# Altium PCB DE-020717.PcbDoc (part 3 of 3)
Units mil, origin at the board's own origin, x right, y up, seen from the top; angles counter-clockwise.
Board outline 2598.43 x 2598.43 mil, 4 copper layers (Top Layer, Power, Ground, Bottom Layer), stack 30.668 mil thick; 178 components, 180 nets, 707 pads, 289 vias.
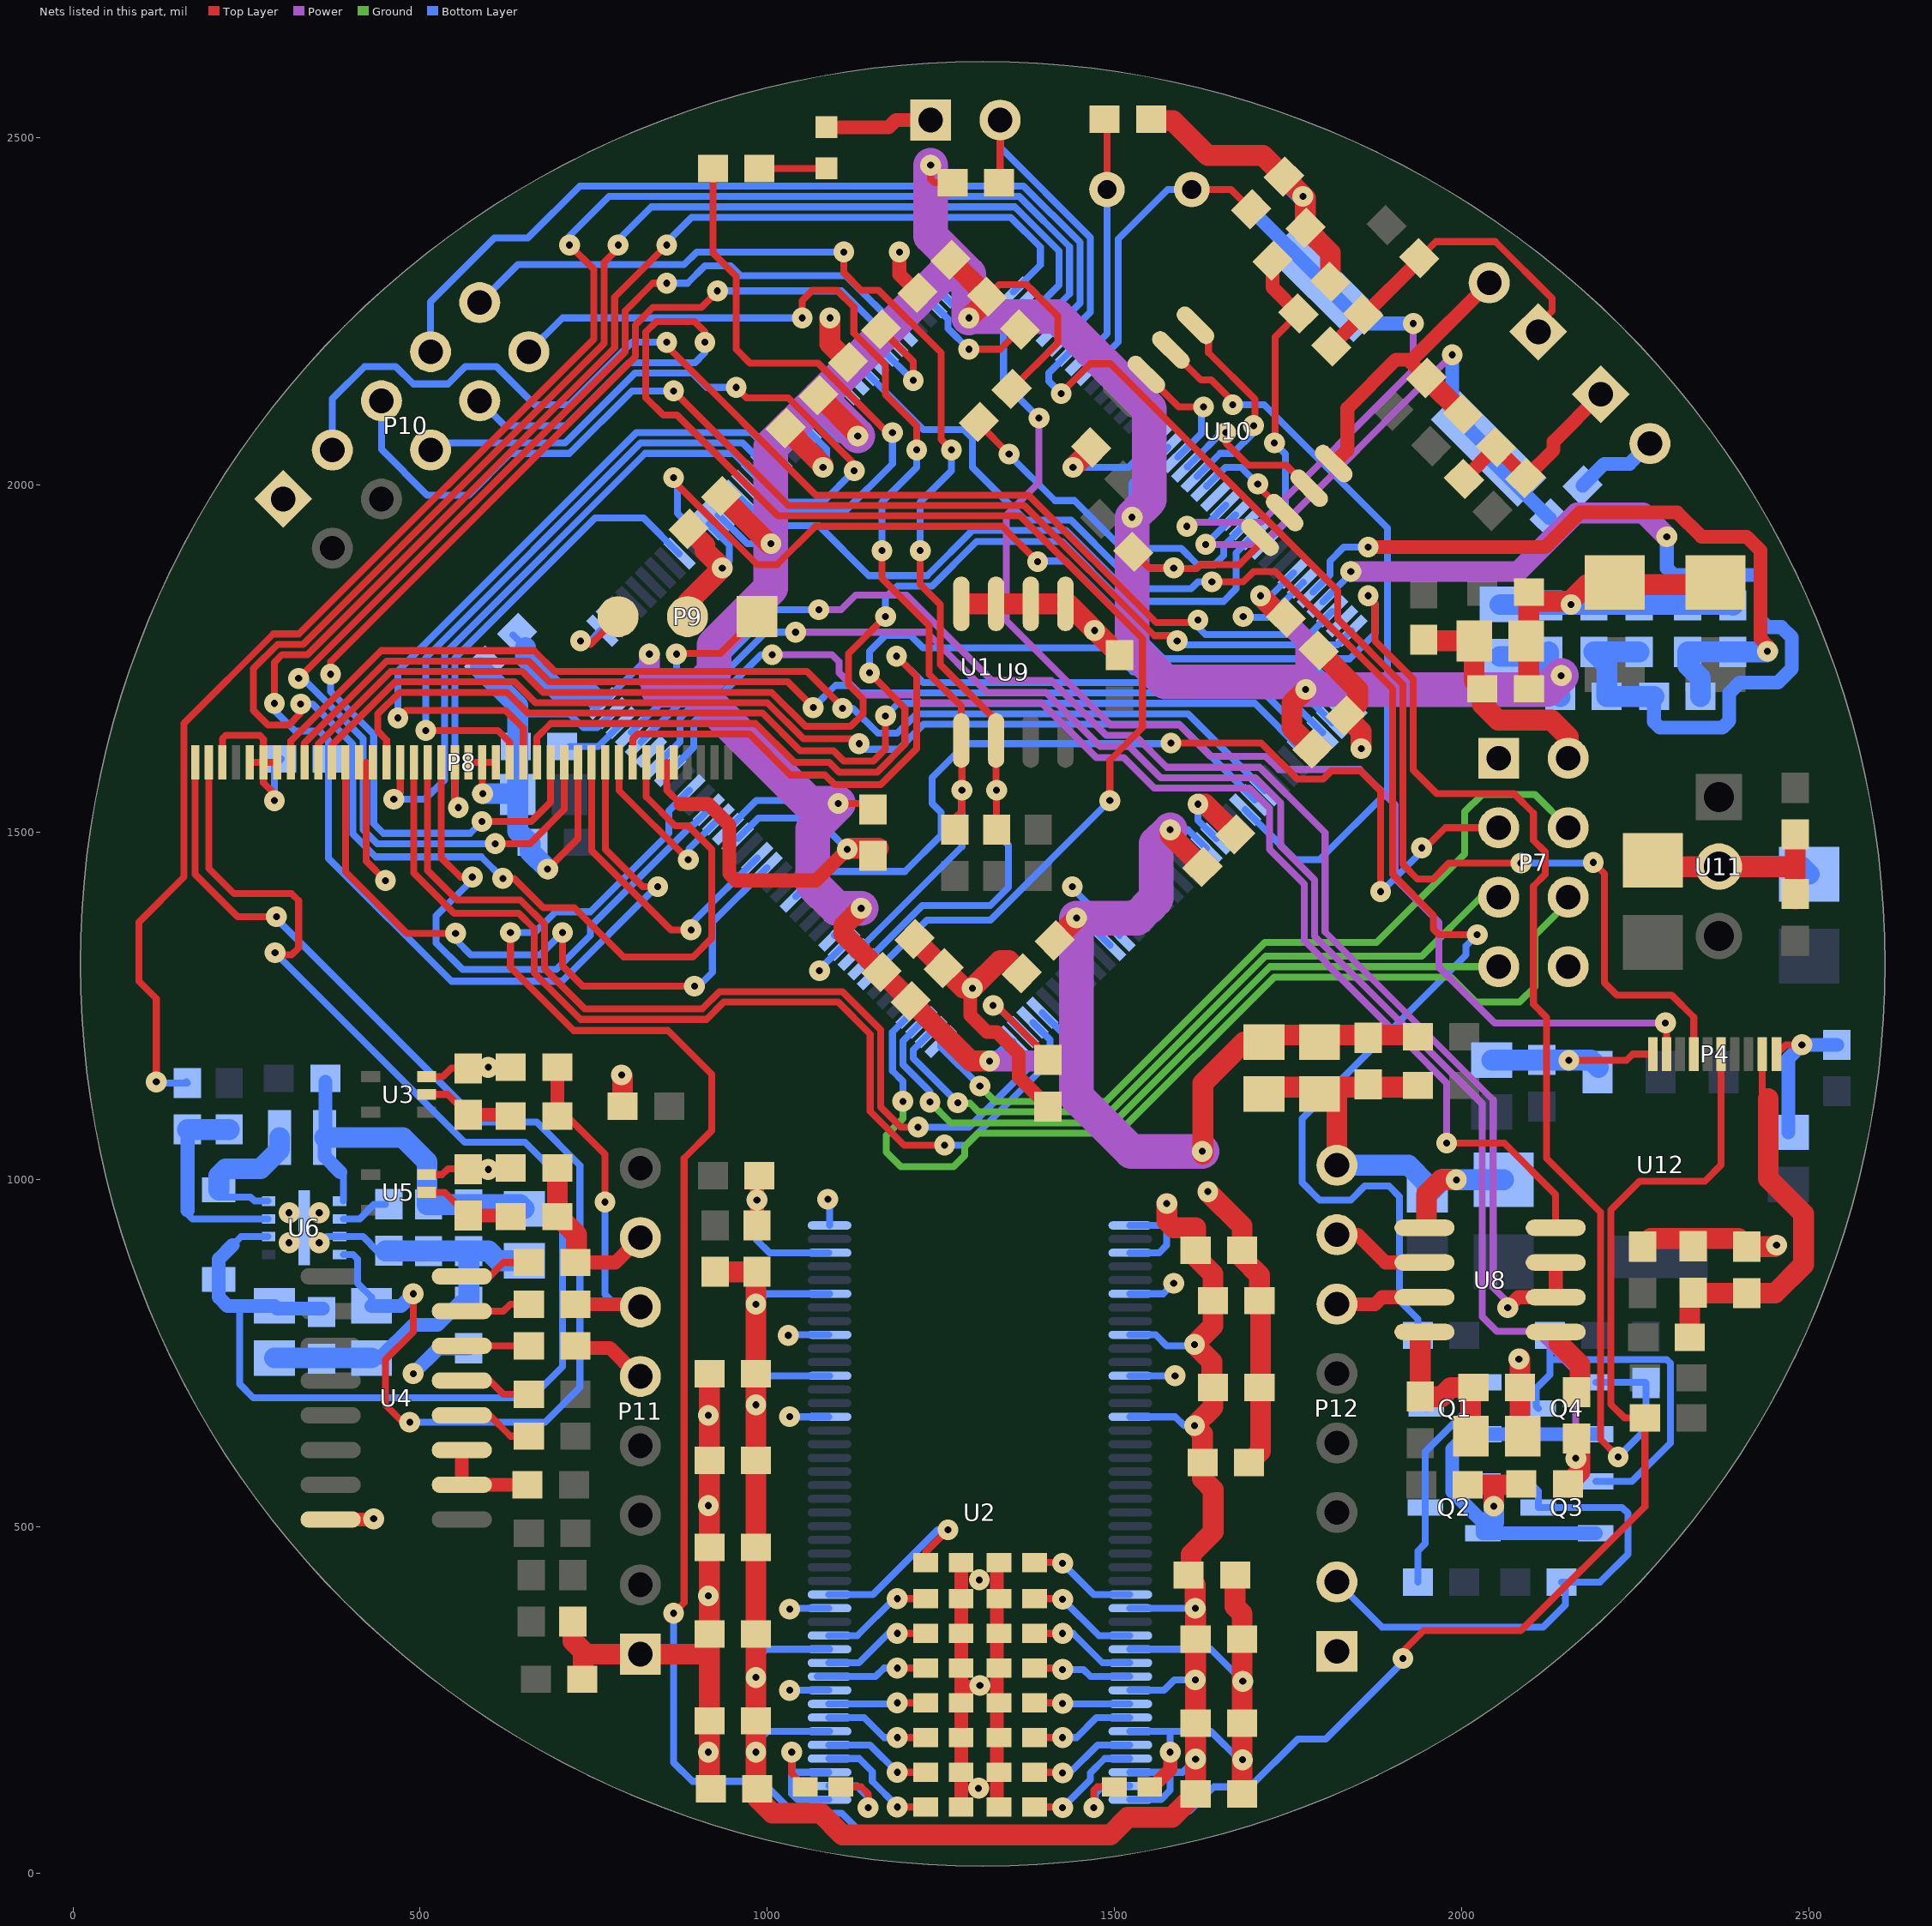
[diagram p4: the nets of this part, all layers, seen from the top]

## Via types
v1: diameter 30, hole 10, Top Layer to Bottom Layer, 289 vias

## Nets (pads, with @x,y where several pads share a name; then routed paths per layer and width w, separated by ;. In a path a pad name is that pad's centre, name@x,y a point inside that pad or via, vN(x,y) a via of type N, cw(c..) or ccw(c..) an arc to the next point about the centre after c; other vN are vias at no path point) (continued)
I2C3_SDA: P4.5 R23.2 U1.99 | length 4226.9
  Top Layer w10: v1(630,1355) 630,1305 721,1214 857,1214 920,1151 920,1070 880,1030 880,390 v1(865,375) ; v1(1915,310) 1915,320 1945,350 2085,350 2263.54,528.54 R23.2@2263.54,656 2234,656 2214.37,675.63 2214.37,955.58 2255.79,997 2350,997 2373.26,1020.26 P4.5@2373.26,1180
  Bottom Layer w10: v1(630,1355) 665,1355 695,1385 745,1385 858,1498 858,1530.21 U1.99@887.63,1559.84 ; v1(865,375) 865,160 892,133 992,133 1038,87 1107.21,87 1134.21,60 1484,60 1514,90 1607.79,90 1642.79,125 1694.79,125 1763.79,194 1804,194 v1@1915,305
I2C4_SCL: P10.9 R25.2 U1.81 U9.6 | length 1929.4
  Top Layer w10: v1(1110,2335) 1110,2305 1135,2280 1160,2280 1250,2190 1250,2065 v1(1265,2050) ; v1(1220,1905) 1220,1856.21 1249,1827.21 1249,1741 1329.14,1660.86 U9.6@1329.14,1631.57 v1@1329.14,1560.86 ; R25.2@1330,1503.46 v1(1330,1560)
  Bottom Layer w10: P10.9@585.71,2262.13 640.58,2317 880,2317 898,2335 v1(1110,2335) ; U1.81@1138.18,1309.29 1222.89,1394 1320.79,1394 1347,1420.21 1347,1481 1330,1498 v1(1330,1560) ; v1(1220,1905) 1220,1975 1265,2020 v1(1265,2050)
I2C4_SDA: P10.10 R26.2 U1.82 U9.5 | length 1691.8
  Top Layer w10: v1(1050,2240) 1050,2265 1065,2280 1100,2280 1124.43,2255.57 1124.43,2218.13 1170,2172.56 1170,2130 1215,2085 v1(1215,2050) ; v1(1165,1905) 1165,1865 1233,1797 1233,1727 1279.14,1680.86 U9.5@1279.14,1631.57 ; R26.2@1270,1503.46 1270,1520 1280,1530 v1(1280,1560) U9.5@1280,1630.72
  Bottom Layer w10: P10.10@656.42,2191.42 705,2240 v1(1050,2240) ; U1.82@1124.26,1323.21 1124.42,1323.21 1280,1478.79 v1(1280,1560) ; v1(1165,1905) 1165,1975 1215,2025 v1(1215,2050)
INDOOR_TEMP: C50.2 R42.1 U1.27 | length 456.6
  Top Layer w10: v1(1730,2060) 1731,2061 1731,2212.69 R42.1@1764.7,2246.39
  Top Layer w20: C50.2@1727.34,2322.34 1727.34,2283.76 R42.1@1764.7,2246.39
  Bottom Layer w10: U1.27@1715.84,1914.78 1746.05,1945 1746.05,2043.95 v1(1730,2060)
LCD_BL_A: C53.1 C54.2 D2.1 P8.2 U6.6 | length 2129.8
  Top Layer w10: P8.2@195.68,1600 195.68,1447.32 232,1411 315,1411 325,1401 325,1333 315,1323 294,1323 v1(291,1326)
  Bottom Layer w10: 230,905 242.2,917.2 U6.6@280.63,917.2 ; 240,820 240,705 260,685 660,685 705,730 705,999 651,1053 564,1053 v1(291,1326)
  Bottom Layer w20: 230,905 210,885 D2.1@210,855.63 210,830 222.6,817.4 C54.2@290,817.4 293.94,813.46 C53.1@360,813.46
LCD_BL_CTRL: R48.2 U1.4 | length 2482.3
  Top Layer w10: v1(120,1140) 120,1260 95,1285 95,1370 160,1435 160,1656.43 288.57,1785 325.36,1785 750,2209.64 750,2310 v1(715,2345) v1@713,2345
  Bottom Layer w10: v1(120,1140) 121.54,1138.46 R48.2@165,1138.46 R48.2@163.46,1140 ; v1(715,2345) 715,2358 772,2415 1362.57,2415 1435,2342.57 1435,2274.66 U1.4@1395.96,2235.62
LCD_BL_K: P8.1 R47.2 U6.4 | length 1865.7
  Top Layer w10: P8.1@176,1600 176,1439 237,1378 v1(293,1378) ; v1(485,650) 475,650 450,675 450,740 490,780 v1(490,835)
  Bottom Layer w10: v1@290,1378 586,1082 668,1082 730,1020 730,700 680,650 v1(485,650) ; U6.4@389.37,891.61 403.39,891.61 410,885 410,850 430,830 R47.2@430,817.4
  Bottom Layer w20: R47.2@430,817.4 472.4,817.4 v1(490,835)
LCD_DE: P8.34 U1.3 | length 2935.6
  Top Layer w10: v1(328,1684) 328,1671 311,1654 281,1654 260,1675 260,1735.21 294.79,1770 331.57,1770 765,2203.43 765,2320 v1@793,2348 ; v1(619,1433) 635,1433 677,1391 722,1391 793,1320 893,1320 920,1347 920,1475 886,1509 867,1509 825.61,1550.39 P8.34@825.61,1600
  Bottom Layer w10: v1(328,1684) 345,1684 403,1626 403,1497 436,1464 588,1464 v1(619,1433) ; v1(785,2345) 785,2352 833,2400 1356.36,2400 1420,2336.36 1420,2287.5 U1.3@1382.04,2249.54
LCD_DISP: P8.31 R58.2 U1.1 | length 2677.6
  Top Layer w10: v1(290,1685) 290,1744 301,1755 337.79,1755 780,2197.21 780,2270 v1(855,2345) v1@855,2351 ; P8.31@766.55,1600 766.55,1474.66 820.21,1421 v1(842,1421)
  Bottom Layer w10: v1(290,1685) 290,1675 320,1645 355,1645 367.94,1632.06 367.94,1462.06 545,1285 704.21,1285 840.21,1421 v1(842,1421) ; v1@855,2351 855,2349 891,2385 1350.15,2385 1393,2342.15 1393,2316.18 U1.1@1354.2,2277.38
LTDC_B3: P8.24 U1.126 | length 893.9
  Top Layer w10: v1(508.08,1646) 612,1646 628.76,1629.24 P8.24@628.76,1600
  Bottom Layer w10: v1(508.08,1646) 508.08,1750.51 817.57,2060 964.08,2060 U1.126@998.25,2025.83
LTDC_B4: P8.25 U1.127 | length 1013.7
  Top Layer w10: v1(468,1664) 479,1675 623,1675 648.44,1649.56 P8.25@648.44,1600
  Bottom Layer w10: v1(468,1664) 468,1731.64 811.36,2075 976.92,2075 U1.127@1012.17,2039.75
LTDC_B5: P8.26 U1.37 | length 1519.5
  Top Layer w10: P8.26@668.12,1600 668.12,1636.12 688,1656 983,1656 1039,1600 1089,1600 1103,1586 1158,1586 1198,1626 1198,1678 v1(1147,1729)
  Bottom Layer w10: v1(1147,1729) 1147,1760 1170,1783 1206,1783 1224,1765 1491.5,1765 1525.75,1730.75 1795.43,1730.75 U1.37@1841.38,1684.8
LTDC_B6: P8.27 U1.139 | length 1681.9
  Top Layer w10: v1(371,1727) 371,1745 810,2184 810,2230 835,2255 905,2255 928,2278 v1(928,2279) ; v1(589,1515) 660,1515 687.81,1542.81 P8.27@687.81,1600
  Bottom Layer w10: v1(371,1727) 371,1702.21 433,1640.21 433,1512 447,1498 572,1498 v1(589,1515) ; v1(928,2279) 1106.99,2279 U1.139@1179.2,2206.78
LTDC_B7: P8.28 U1.140 | length 1833.5
  Top Layer w10: v1(325,1721) 795,2191 795,2250 835,2290 v1(855,2290) ; v1(608,1483) 658,1483 707.49,1532.49 P8.28@707.49,1600
  Bottom Layer w10: v1(325,1721) 331,1721 418,1634 418,1503.21 438.21,1483 v1(608,1483) ; v1(855,2290) 885,2290 910,2315 947,2315 961,2301 1112.82,2301 U1.140@1193.12,2220.7
LTDC_CLK: P8.30 U1.92 | length 445.9
  Top Layer w10: P8.30@746.86,1600 746.86,1473.14 861,1359 v1(890,1359)
  Bottom Layer w10: v1(890,1359) v1@891,1359 ; v1@894.83,1372.17 U1.92@985.07,1462.4
LTDC_DE: U1.22
LTDC_G2: P8.15 U1.42 | length 1554.2
  Top Layer w10: P8.15@451.59,1600 451.59,1632.41 439,1645 439,1669.79 470.21,1701 625,1701 655,1671 993,1671 1047,1617 1095,1617 1110,1602 1152.79,1602 1170,1619.21 v1(1170,1667) v1@1168.79,1667
  Bottom Layer w10: v1(1170,1667) 1188,1685 1701.99,1685 U1.42@1771.78,1615.2
LTDC_G3: P8.16 U1.125 | length 905.3
  Top Layer w10: v1(462,1547) 471.28,1556.28 P8.16@471.28,1600
  Bottom Layer w10: v1(462,1547) 507,1547 535.01,1575.01 535.01,1756.23 823.79,2045 951.24,2045 U1.125@984.33,2011.91
LTDC_G4: P8.17 U1.69 | length 1499
  Top Layer w10: P8.17@490.96,1600 490.96,1441.04 549,1383 642,1383 664,1361 664,1297 731,1230 912.21,1230 937.21,1255 1101.79,1255 1148,1208.79 1148,1097.79 1196.79,1049 v1(1255,1049)
  Bottom Layer w10: v1(1255,1049) 1285.59,1049 1424.62,1188.03 1424.62,1210.72 U1.69@1395.96,1239.38
LTDC_G5: P8.18 U1.70 | length 1420.8
  Top Layer w10: P8.18@510.64,1600 510.64,1444.36 553,1402 644.21,1402 679,1367.21 679,1303.21 737.21,1245 906,1245 931,1270 1108,1270 1163,1215 1163,1104 1192,1075 v1(1217,1075)
  Bottom Layer w10: v1@1217,1074.75 1290.12,1074.75 1407,1191.62 1407,1200.5 U1.70@1382.04,1225.46
LTDC_G6: P8.19 U1.97 | length 821
  Top Layer w10: P8.19@530.33,1600 530.33,1462.67 558,1435 v1(575,1435)
  Bottom Layer w10: v1(575,1435) 575,1431 523,1379 523,1340 561,1302 696,1302 745,1351 745,1363.79 891.21,1510 893.47,1510 U1.97@915.47,1532
LTDC_G7: P8.20 U1.117 | length 712.1
  Top Layer w10: P8.20@550.01,1600 550.01,1539.99 v1(555,1535)
  Bottom Layer w10: v1(555,1535) 550.01,1539.99 550.01,1750.01 752,1952 821.53,1952 U1.117@872.98,1900.55
LTDC_HSYNC: P8.32 U1.96 | length 260.8
  Top Layer w10: P8.32@786.24,1600 786.24,1559.76 v1@888,1458
  Bottom Layer w10: v1@887,1459 887,1475.69 U1.96@929.39,1518.08
  other v1: 886,1460
LTDC_R3: P8.8 U1.46 | length 1592.9
  Top Layer w10: P8.8@313.8,1600 313.8,1630.8 444,1761 664,1761 694,1731 1057,1731 v1@1108,1680
  Bottom Layer w10: v1(1108,1678) 1123,1678 1159,1642 1186.79,1642 1214.79,1670 1605.63,1670 U1.46@1716.1,1559.53
LTDC_R4: P8.9 U1.41 | length 1608.2
  Top Layer w10: P8.9@333.48,1600 333.48,1627.91 451.57,1746 656,1746 686,1716 1029,1716 v1(1066,1679) v1@1069,1676
  Bottom Layer w10: v1(1066,1679) 1098,1711 1121,1711 1132,1700 1714.82,1700 U1.41@1785.7,1629.12
LTDC_R5: P8.10 U1.26 | length 1763.9
  Top Layer w10: P8.10@353.16,1600 353.16,1626.38 457.79,1731 647,1731 677,1701 1006,1701 1055,1652 1120,1652 1138,1670 1138,1691 1117,1712 1117,1757 v1(1170,1810)
  Bottom Layer w10: v1(1170,1810) 1170,1837 1187,1854 1237,1854 1301,1918 1424,1918 1510,1832 1657,1832 1675,1850 1675,1901.78 U1.26@1701.92,1928.7
LTDC_R6: P8.11 U1.47 | length 1492.3
  Top Layer w10: P8.11@372.85,1600 372.85,1624.85 464,1716 636,1716 666,1686 999.79,1686 1051.79,1634 1125,1634 v1(1132,1627)
  Bottom Layer w10: v1(1132,1627) 1140,1619 1189,1619 1225,1655 1592.79,1655 U1.47@1702.18,1545.61
LTDC_R7: P8.12 U1.91 | length 1013.6
  Top Layer w10: P8.12@392.53,1600 392.53,1442.47 481,1354 v1(551,1354) ; v1@705,1357 v1(705,1355) 705,1307 734,1278 v1(895,1278) v1@888,1285
  Bottom Layer w10: v1@553,1356 v1(551,1354) 551,1345 573,1323 673,1323 v1(705,1355) ; v1@901,1278 920.75,1297.75 920.75,1369.67 U1.91@999.25,1448.17
LTDC_VSYNC: P8.33 U1.40 | length 1301.9
  Top Layer w10: P8.33@805.92,1600 806,1600.08 806,1634 813,1641 974,1641 1033,1582 1083,1582 1097,1568 1163,1568 1215,1620 1215,1724 v1(1186,1753)
  Bottom Layer w10: v1(1186,1753) 1224,1715 1727.66,1715 U1.40@1799.62,1643.04
MAINS_ZC: P11.6 R29.1 R33.2 R35.2 | length 509.1
  Top Layer w10: R29.1@697.46,1091 711,1091 766,1036 v1(766,967)
  Top Layer w20: R29.1@697.46,1091 R35.2@697.46,1161 ; R33.2@723.46,820 808,820 809,821 P11.6@810,820
  Bottom Layer w10: v1(766,967) 766,834 784,816 P11.6@817,816
MOTOR_RPM: P11.7 R32.2 R41.1 R44.2 | length 257.4
  Top Layer w20: R32.2@723.46,880 781,880 P11.7@817,916
  Top Layer w30: R44.2@697.46,1016 R41.1@697.46,946 699,946 725,920 725,881.54 R32.2@723.46,880
MOTOR_TRIAC: P11.5 R34.2 | length 103.1
  Top Layer w20: R34.2@723.46,760 726.46,757 773,757 P11.5@810,720
NetC2_2: C2.2 C3.2 C4.2 C5.2 C6.2 C13.2 C14.2 C15.2 C16.2 C17.2 C19.2 C20.2 C21.2 C22.2 C23.2 L2.2 U2.1 U2.3 U2.9 U2.15 U2.29 U2.35 U2.41 U2.43 U2.49 U2.55 U2.75 U2.81 | length 3736
  Top Layer w30: L2.2@925,866.54 C16.2@985,866.54 983.46,865 v1(983.46,820) C17.2@983.46,720 ; C17.2@986.61,716.85 C17.2@983.46,720 ; v1(1575,965) 1575,940 1585,930 1616.54,930 1616.54,888.46 1641.54,863.46 C14.2@1641.54,825 1641.54,788.54 v1(1615,762) 1640,737 1640,701.54 C13.2@1641.54,700 1641.54,671.54 v1(1615,645) 1626.54,633.46 C6.2@1626.54,592 1626.54,568.46 1642,553 1642,492 1610,460 1610,422 1616,416 v1(1616,382) 1616.54,381.46 C4.2@1616.54,337.86 C3.2@1616.54,216.43 v1(1616.54,165) 1616.54,120 C2.2@1611.54,115 ; C2.2@1616.54,115 1582.54,81 1519,81 1494,56 1108,56 1077,87 1007,87 985.46,108.54 C23.2@985.46,122 983.46,124 v1(983.46,175) C22.2@983.46,220 v1(983.46,282.5) C21.2@983.46,345 C20.2@983.46,470 v1(983.46,675) C17.2@983.46,720
  Bottom Layer w10: v1(983.46,175) 983.46,188.46 1000.04,205.04 U2.49@1089.46,205.04 ; v1(983.46,282.5) 983.46,308.46 998.15,323.15 U2.55@1089.46,323.15 ; v1(983.46,675) 983.46,703.46 996.85,716.85 U2.75@1089.46,716.85 ; v1(983.46,820) 998.43,834.96 U2.81@1089.46,834.96 ; U2.43@1521.54,106.61 U2.43@1522.54,106.61 1566.61,106.61 1580,120 1580,145.98 ; U2.41@1521.54,145.98 1580,145.98 ; U2.35@1521.54,264.09 1571.09,264.09 1586,279 v1(1616,279) ; U2.29@1521.54,382.2 1615.8,382.2 v1(1616,382) ; U2.15@1521.54,657.8 1587.2,657.8 1600,645 v1(1615,645) ; U2.9@1521.54,775.91 1559.09,775.91 1575,760 1613,760 v1(1615,762) ; U2.3@1521.54,894.02 1564.02,894.02 1575,905 1575,931.5 ; U2.1@1521.54,933.39 1573.11,933.39 1575,931.5 ; v1(1575,965) 1575,931.5 ; v1(1616.54,165) 1597.52,145.98 1580,145.98
NetC33_2: C33.2 C34.2 R27.2 U1.32 | length 1063
  Top Layer w20: v1(1865,1910) 2120,1910 2170,1960 2310,1960 2345,1925 2410,1925 2430,1905 2430,1778 2440,1768 v1(2440,1760)
  Bottom Layer w10: U1.32@1785.44,1845.19 1810,1869.75 1810,1890 1830,1910 v1(1865,1910)
  Bottom Layer w30: R27.2@2343.46,1695 2343.46,1721.54 2325,1740 C34.2@2325,1759.13 C33.2@2390,1759.13 2439.13,1759.13 v1(2440,1760)
NetC36_2: C36.2 U1.106 | length 89.1
  Bottom Layer w10: C36.2@715.46,1623 756.5,1623 U1.106@790.46,1656.96
NetC37_2: C37.2 U1.71 | length 169.7
  Top Layer w10: v1(1325,1250) 1330,1250 C37.2@1405,1175
  Bottom Layer w10: v1(1325,1250) 1329.71,1250 U1.71@1367.85,1211.85
NetC46_2: C46.2 P2.1 R28.1 R30.2 | length 292.7
  Top Layer w20: R30.2@2002.95,2008.15 C46.2@2048.91,2054.11 2091.34,2011.69 R28.1@2091.34,2009.51 2131.82,2050 2131.82,2061.82 P2.1@2200,2130
NetC47_2: C47.2 R29.2 U3.2 | length 134
  Top Layer w10: U3.2@509.35,1122 539.54,1122 C47.2@569,1092.54
  Top Layer w20: C47.2@569,1092.54 629,1092.54 R29.2@630.54,1091
NetC48_2: C48.2 P3.1 R39.2 R42.2 | length 475.2
  Top Layer w10: R39.2@1938.66,2326.34 1962.33,2350 2048,2350 2130,2268 2130,2250 2110,2230 P3.1@2110,2220
  Top Layer w20: R42.2@1812.03,2199.07 C48.2@1857.99,2245.03 1860.03,2245.03 1933.66,2318.66 R39.2@1933.66,2331.34
NetC52_2: C52.2 R41.2 U5.2 | length 133.5
  Top Layer w10: U5.2@509.35,981 535.54,981 C52.2@569,947.54
  Top Layer w20: C52.2@569,947.54 R41.2@629,947.54
NetC53_2: C53.2 C54.1 C55.2 C56.2 C57.2 L7.2 R45.2 R47.1 U6.3 U6.9 | length 699.8
  Top Layer w10: v1@312,953 v1@313.35,951.65
  Bottom Layer w10: v1@356.65,908.35 365.51,917.2 386.18,917.2 417.8,917.2 438.46,896.54 R45.2@450,896.54
  Bottom Layer w20: R47.1@430,742.6 442.6,742.6 490,790 525,790 558.46,823.46 L7.2@570,823.46
  Bottom Layer w30: C54.1@290,742.6 R47.1@430,742.6 ; R45.2@450,896.54 510,896.54 C56.2@570,896.54 ; L7.2@570,823.46 C56.2@570,896.54 ; C57.2@650,882.6 612.4,882.6 598.46,896.54 C56.2@570,896.54
  other v1: 311.34,908.35 354.65,908.35 311.34,951.66 354.65,951.66
NetC55_1: C55.1 C56.1 C57.1 L4.1 L5.2 U6.1 | length 549.2
  Bottom Layer w10: 385,1010 389.37,1005.63 U6.1@389.37,968.39
  Bottom Layer w20: L5.2@363.46,1140 363.46,1060.98 L4.1@362.48,1060 362.48,1032.52 385,1010
  Bottom Layer w30: L4.1@362.48,1060 475,1060 510,1025 510,963.46 C56.1@570,963.46 643.94,963.46 C57.1@650,957.4
NetC67_2: C67.2 C68.2 L8.2 P4.2 | length 574.2
  Top Layer w10: P4.2@2432.31,1180 2432.31,1124.68 2441,1116
  Top Layer w30: L8.2@2327.95,772.24 2327.95,833.31 2334.49,839.84 2338.43,835.91 C68.2@2410,835.91 2450.91,835.91 2492,877 2492,950 2441,1001 2441,1116
NetC70_2: C70.2 C71.2 L9.1 U8.8 | length 232.7
  Top Layer w30: 1940,766 L9.1@1940,686.93 1970.93,686.93 1984,700 C71.2@2016.54,700 2012.6,696.06 C70.2@2012.6,630
NetC73_2: C73.2 C74.2 L10.1 P7.2 | length 343.4
  Top Layer w30: L10.1@1945,1776.54 1946.54,1775 C73.2@2017.6,1775 2017.6,1717.81 C74.2@2029.41,1706 2029.41,1683.59 2052,1661 2129,1661 2153,1637 P7.2@2153,1606
NetD1_1: D1.1 R31.1 | length 96.7
  Top Layer w10: R31.1@988.46,2455 1084.53,2455 D1.1@1085,2455.47
NetD2_2: D2.2 L4.2 U6.8 | length 214.3
  Bottom Layer w10: D2.2@210,974.37 255.63,974.37 261.61,968.39 U6.8@280.63,968.39
  Bottom Layer w30: D2.2@210,984.37 210,1005 220,1015 270,1015 297.52,1042.52 L4.2@297.52,1060
NetP1_2: P1.2 R24.2 U1.6 | length 479.6
  Top Layer w10: R24.2@1333.46,2435 1335,2436.54 P1.2@1335,2525
  Bottom Layer w10: P1.2@1335,2525 1335,2486 1465,2356 1465,2248.56 U1.6@1423.53,2207.09
NetQ1_1: Q1.1 Q2.3 R51.2 | length 326.7
  Bottom Layer w10: R51.2@1936.54,420 1936.54,464.54 1947.32,475.32 Q2.3@1947.32,527.4 1947.32,607.32 2031.34,691.34 Q1.1@2031.34,707.4
NetQ3_1: Q3.1 Q4.3 R55.1 | length 535.1
  Bottom Layer w10: Q4.3@2110,670 2107,673 2107,699 2126.54,718.54 2126.54,740 ; R55.1@2126.54,775 2126.54,740 ; Q3.1@2192.68,564.8 2244.8,564.8 2300,620 2300,735 2295,740 2126.54,740
NetR1_1: R1.1 U2.31 | length 160.6
  Top Layer w10: R1.1@1381.59,396 v1@1424,396
  Bottom Layer w10: v1(1425,395) 1477.17,342.83 U2.31@1521.54,342.83
NetR2_1: R2.1 U2.33 | length 157.6
  Top Layer w10: R2.1@1381.59,346 v1(1425,346)
  Bottom Layer w10: v1(1425,346) 1440,346 1482.54,303.46 U2.33@1521.54,303.46
NetR3_1: R3.1 U2.34 | length 145
  Top Layer w10: R3.1@1381.59,296 1423,296 v1(1425,294)
  Bottom Layer w10: v1(1425,294) 1455,294 1465.22,283.78 U2.34@1521.54,283.78
NetR4_1: R4.1 U2.36 | length 139.2
  Top Layer w10: R4.1@1381.59,246 v1@1424,246
  Bottom Layer w10: v1(1425,245) 1425.59,244.41 U2.36@1521.54,244.41
NetR5_1: R5.1 U2.37 | length 151.8
  Top Layer w10: R5.1@1381.59,196 v1(1425,196)
  Bottom Layer w10: v1(1425,196) 1445,196 1473.72,224.72 U2.37@1521.54,224.72
NetR6_1: R6.1 U2.39 | length 155.7
  Top Layer w10: R6.1@1381.59,146 v1@1424,146
  Bottom Layer w10: v1(1425,145) 1435,145 1475.35,185.35 U2.39@1521.54,185.35
NetR7_1: R7.1 U2.40 | length 174.1
  Top Layer w10: R7.1@1381.59,96 v1@1424,96
  Bottom Layer w10: v1(1425,95) 1465,135 1465,145 1485.67,165.67 U2.40@1521.54,165.67
NetR8_1: R8.1 U2.42 | length 133.7
  Top Layer w10: v1(1470,95) 1470,120 1475,125 R8.1@1499.41,125
  Bottom Layer w10: v1@1472,92 1472,115 1483.3,126.3 U2.42@1521.54,126.3
NetR9_1: R9.1 U2.45 | length 141.8
  Top Layer w10: R9.1@1105.59,125 1135,125 1145,115 v1(1145,95)
  Bottom Layer w10: U2.45@1088.46,126.3 U2.45@1089.46,126.3 1128.7,126.3 1145,110 v1(1145,95)
NetR10_1: R10.1 U2.47 | length 180
  Top Layer w10: v1(1187,96) R10.1@1230.82,96
  Bottom Layer w10: U2.47@1088.46,165.67 1132.33,165.67 1151,147 1151,133 1187,97 v1(1187,96)
NetR11_1: R11.1 U2.48 | length 158.7
  Top Layer w10: v1(1187,146) R11.1@1230.82,146
  Bottom Layer w10: U2.48@1088.46,185.35 1147.65,185.35 v1(1187,146)
NetR12_1: R12.1 U1.143 | length 175.7
  Top Layer w10: v1(1290,2195) 1335.33,2195 R12.1@1363.66,2223.34
  Bottom Layer w10: U1.143@1235.62,2262.77 1260,2238.39 1260,2225 v1(1290,2195)
NetR13_1: R13.1 U1.138 | length 154.7
  Top Layer w10: R13.1@1163.66,2223.66 1210,2177.33 v1(1210,2150)
  Bottom Layer w10: U1.138@1166.02,2193.17 1209.19,2150 v1(1210,2150)
NetR14_1: R14.1 U2.50 | length 154.3
  Top Layer w10: v1(1187,196) R14.1@1230.82,196
  Bottom Layer w10: U2.50@1088.46,224.72 1139.28,224.72 1168,196 v1(1187,196)
NetR15_1: R15.1 U2.51 | length 140.8
  Top Layer w10: v1(1187,246) R15.1@1230.82,246
  Bottom Layer w10: U2.51@1088.46,244.41 v1@1185.41,244.41
NetR16_1: R16.1 U2.53 | length 164.4
  Top Layer w10: v1(1187,296) R16.1@1230.82,296
  Bottom Layer w10: U2.53@1071.46,283.78 1088.46,283.78 1155.78,283.78 1168,296 v1(1187,296)
NetR17_1: R17.1 U2.54 | length 160
  Top Layer w10: v1(1187,346) R17.1@1230.82,346
  Bottom Layer w10: U2.54@1088.46,303.46 1131.46,303.46 1174,346 v1(1187,346)
NetR18_1: R18.1 U2.56 | length 164.4
  Top Layer w10: v1(1187,396) R18.1@1230.82,396
  Bottom Layer w10: U2.56@1088.46,342.83 1129.48,342.83 1182.64,396 v1(1187,396)
NetR19_1: R19.1 U2.28 | length 160
  Top Layer w10: R19.1@1380.59,448 1424,448 v1(1425,447)
  Bottom Layer w10: v1(1425,447) 1470.11,401.89 U2.28@1521.54,401.89
NetR20_1: R20.1 U2.59 | length 270.4
  Top Layer w10: R20.1@1227.82,448 1227.82,462.82 v1(1260,495)
  Bottom Layer w10: U2.59@1088.46,401.89 U2.59@1089.46,401.89 1151.89,401.89 1245,495 v1(1260,495)
NetR22_1: R22.1 U1.25 | length 502.7
  Top Layer w10: R22.1@1304.34,2090.34 1304.34,2087.66 v1(1348,2044)
  Bottom Layer w10: v1(1348,2044) 1348,2043 1414,1977 1442,1977 1511,1908 1596,1908 1619,1885 1644,1885 1657,1898 1657,1911.62 U1.25@1688,1942.62
NetR32_1: R32.1 U4.16 | length 104.8
  Top Layer w10: U4.16@560,860 600,860 620,880 R32.1@656.54,880
NetR33_1: R33.1 U4.15 | length 100.7
  Top Layer w10: U4.15@560,810 620,810 630,820 R33.1@656.54,820
NetR34_1: R34.1 U4.14 | length 96.5
  Top Layer w10: U4.14@560,760 R34.1@656.54,760
NetR36_1: R36.1 U4.13 | length 104.8
  Top Layer w10: U4.13@560,710 600,710 620,690 R36.1@656.54,690
NetR37_1: R37.1 U4.12 | length 109
  Top Layer w10: U4.12@560,660 600,660 630,630 R37.1@656.54,630
NetR38_1: R38.1 U4.10 U4.11 | length 146.5
  Top Layer w20: U4.11@560,610 U4.10@560,560 R38.1@656.54,560
NetR45_1: R45.1 U6.2 | length 69.2
  Bottom Layer w10: U6.2@389.37,942.8 412.8,942.8 433.46,963.46 R45.1@450,963.46
NetR46_1: R46.1 R48.1 U6.7 | length 300.1
  Bottom Layer w10: 165,955 165,950 172.2,942.8 U6.7@280.63,942.8
  Bottom Layer w20: 165,955 R48.1@165,1071.54
  Bottom Layer w30: R48.1@165,1071.54 R46.1@225,1071.54
NetR57_2: R57.2 U8.1 | length 86
  Top Layer w30: 2140,767 2140,763 2170,733 R57.2@2170,693.46
NRF24L01_CE: P7.3 U1.88 | length 1395.2
  Top Layer w10: v1(1581,1628) 1711,1628 1763,1576 1800,1576 1812,1588 1854,1588 1883,1559 v1(1883,1414) ; v1(1942,1477) 1947,1477 1976,1506 P7.3@2053,1506
  Bottom Layer w10: U1.88@1040.75,1406.72 1077.02,1443 1198,1443 1250,1495 1250,1528 1237,1541 1237,1578.21 1285.79,1627 v1@1581,1627 ; v1(1883,1414) 1884,1414 1942,1472 v1(1942,1477)
NRF24L01_IRQ: P7.8
ONE_WIRE: P12.2 Q2.1 Q3.3 R52.1 | length 817.4
  Bottom Layer w10: P12.2@1820,420 1885,355 2117,355 2149,387 2149,414.46 R52.1@2143.46,420 2199,420 2239,460 2239,519 2230.6,527.4 Q3.3@2110,527.4 2110,551 2096.2,564.8 Q2.1@2030,564.8
ONE_WIRE_RX: Q1.3 R53.2 U1.122 | length 2526.7
  Top Layer w10: v1(1640,1860) 1685,1860 1700,1875 1731,1875 1900,1706 1900,1439 1959,1380 1959,1360 1967,1352 v1(2022,1352)
  Bottom Layer w10: U1.122@943.31,1970.46 972.77,1941 1074,1941 1146,1869 1230,1869 1295,1934 1430,1934 1514,1850 1610,1850 1620,1860 v1(1640,1860) ; Q1.3@1948.66,670 1951,672.34 1951,698 1936.54,712.46 R53.2@1936.54,775 1936.54,798.46 1910,825 1910,975 1895,990 1860,990 1840,970 1795,970 1770,995 1770,1087 2006,1323 2006,1336 v1(2022,1352)
ONE_WIRE_TX: Q4.1 R54.1 U1.119 | length 3011.3
  Top Layer w10: v1(865,2010) 865,2005 985,1885 1014,1885 1069,1940 1338,1940 v1(1389,1889) ; v1(1865,1840) 1875,1830 1875,1775 1930,1720 1930,1589 1964,1555 2075,1555 2103,1527 2103,1488 2120,1471 2120,1439 2103,1422 2103,1252 2122,1233 2122,1030.05 2199.37,952.68 2199.37,625.63 v1(2225,600)
  Bottom Layer w10: v1(865,2010) 865.5,2010 870.5,2015 870.5,1958.71 U1.119@900.82,1928.39 ; v1(1389,1889) 1390,1890 1430,1890 1570.75,1749.25 1838.37,1749.25 1874.78,1785.65 1874.78,1828.67 1865,1838.45 v1(1865,1840) ; Q4.1@2192.68,707.4 2264.13,707.4 R54.1@2265,706.54 2265,640 v1(2225,600)
OSC32_IN: C29.2 U1.8 Y2.2 | length 364.5
  Top Layer w10: Y2.2@1488.98,2425 C29.2@1488.98,2527.56
  Bottom Layer w10: U1.8@1450.63,2178.94 1488.98,2217.28 Y2.2@1488.98,2425
OSC32_OUT: C43.2 U1.9 Y2.1 | length 438.1
  Top Layer w10: Y2.1@1611.02,2425 1667.67,2425 C43.2@1696.34,2396.34
  Bottom Layer w10: U1.9@1464.55,2165.02 1505,2205.47 1505,2353.64 1576.36,2425 Y2.1@1611.02,2425
OSC_IN: C11.2 U1.23 Y1.2 | length 858.3
  Power w10: v1(1604,1940) 1610,1946 1711,1946 1930,2165 v1(1930,2232)
  Bottom Layer w10: v1(1604,1940) 1610,1946 1635.7,1946 U1.23@1660.16,1970.46
  Bottom Layer w20: C11.2@1696.34,2396.34 1801.68,2290.99 Y1.2@1801.68,2288.32 1858,2232 v1(1930,2232)
OSC_OUT: C18.2 U1.24 Y1.1 | length 822.6
  Power w10: v1(1631,1914) 1713,1914 v1(1986,2187)
  Bottom Layer w10: v1(1631,1914) 1673.54,1956.54 U1.24@1674.08,1956.54
  Bottom Layer w20: v1(1986,2187) 1986,2104 Y1.1@2038.31,2051.68 2038.32,2039.36 C18.2@2126.34,1951.34
QSPI_BK1_IO0: U1.20 U10.5 | length 300.7
  Top Layer w10: U10.5@1616.31,2229.4 1635,2210.71 1635,2190 1702,2123 1702,2093 v1@1710,2085
  Bottom Layer w10: U1.20@1618.67,2011.91 1651.76,2045 1670,2045 1700,2075 v1(1700,2085)
QSPI_BK1_IO1: U1.21 U10.2 | length 156.3
  Top Layer w10: v1(1706,2001) 1709.29,2001 1714,1996.29 1711,1993.29 U10.2@1744.64,1959.64
  Bottom Layer w10: U1.21@1632.59,1997.99 1659.6,2025 1682,2025 v1(1706,2001)
QSPI_BK1_IO2: U1.19 U10.3 | length 247.2
  Top Layer w10: v1(1660,2075) 1660,2060 1692,2028 1747,2028 U10.3@1780,1995
  Bottom Layer w10: U1.19@1605.83,2025.83 1604.75,2025.83 1660,2081.08 v1(1660,2075)
QSPI_BK1_IO3: U1.18 U10.7 | length 190
  Top Layer w10: U10.7@1545.6,2158.69 1592.29,2112 v1(1628,2112)
  Bottom Layer w10: U1.18@1590.83,2039.75 1624.82,2073.74 1624.82,2109.82 1627,2112 v1(1628,2112)
QSPI_BK1_NCS: R61.2 U1.136 U10.1 | length 805.4
  Top Layer w10: R61.2@1526.66,1903.34 1550,1880 v1(1585,1880) 1586,1879 1618,1879 1624,1885 1680,1885 1712.44,1917.44 U10.1@1716.49,1917.44
  Bottom Layer w10: U1.136@1138.18,2165.33 1224.52,2079 1283,2079 1295,2067 1295,2025 1371,1949 1437,1949 1506,1880 v1(1585,1880)
QSPI_CLK: U1.48 U10.6 | length 1075.8
  Top Layer w10: U10.6@1580.95,2194.05 1624,2151 1639,2151 1670,2120 v1(1670,2115)
  Bottom Layer w10: v1(1670,2115) 1715.29,2115 1892.75,1937.55 1892.75,1557.75 1795,1460 1760,1460 U1.48@1688,1532
RS485_A: P12.7 U8.6 | length 142.6
  Top Layer w20: P12.7@1820,920 1850,920 1890,880 U8.6@1946.02,880
RS485_B: P12.6 U8.7 | length 130.2
  Top Layer w20: P12.6@1820,820 1875,820 1885,830 U8.7@1946.02,830
RS485_DIR: U1.104 U8.2 U8.3 | length 2141.6
  Top Layer w20: v1(2066,815) 2081,830 U8.2@2135,830 U8.3@2135,880
  Power w10: v1(1074,1820) 1106,1820 1127,1841 1200,1841 1323,1718 1409,1718 1488,1639 1529,1639 1575,1593 1709,1593 1803,1499 1803,1356 2045,1114 2045,844 2076,813 v1@2073,813
  Bottom Layer w10: U1.104@818.04,1629.44 855.6,1667 856,1667 1009,1820 v1(1074,1820)
RS485_RX: R57.1 R59.1 U1.102 | length 2317.3
  Top Layer w30: R59.1@2152.46,561 2170,578.54 R57.1@2170,626.54
  Power w10: v1(1040.5,1787.5) 1229.5,1787.5 1316,1701 1401,1701 1479,1623 1521,1623 1566,1578 1702.79,1578 1739,1541.79 1739,1480 1788,1431 1788,1349.79 2029,1108.79 2029,802 2050,781 2106,781 2164,723 v1(2164,598)
  Bottom Layer w10: U1.102@845.87,1601.6 874,1629.72 874,1663.79 997.71,1787.5 v1(1040.5,1787.5)
RS485_TX: U1.101 U8.4 | length 1878.8
  Top Layer w10: v1(1978,1052) 2061,1052 2135,978 U8.4@2135,930
  Power w10: v1(1007,1755) 1093,1755 1103,1745 1103,1729 1135,1697 1209,1697 1220,1686 1394.79,1686 1473.79,1607 1513,1607 1557,1563 1694,1563 1723,1534 1723,1474.79 1772.89,1424.89 1772.89,1410.11 1773,1410 1773,1343.57 1805,1311.57 1805,1310 1924.82,1190.18 1926.39,1190.18 1978,1138.57 v1(1978,1052)
  Bottom Layer w10: U1.101@859.79,1587.68 894,1621.88 894,1658 991,1755 v1(1007,1755)
SAI2_FS_B: P10.6 U1.124 | length 908
  Top Layer w10: v1(955,2140) 970,2125 1030,2125 1125,2030 v1(1125,2020)
  Bottom Layer w10: P10.6@515,2050 515,2060 708.79,2060 809.53,2160.75 891.75,2160.75 912.5,2140 v1(955,2140) ; U1.124@971.15,1998.3 994.45,1975 1080,1975 v1(1125,2020)
SAI2_MCLK_B: P10.7 U1.5 | length 1253.9
  Bottom Layer w10: P10.7@515,2191.42 515,2263 607,2355 655,2355 730,2430 1368.79,2430 1450,2348.79 1450,2261.4 U1.5@1409.61,2221.01
SAI2_SCK_B: P10.5 U1.36 | length 1720.5
  Top Layer w10: v1(865,2135) 1030,1970 1369.79,1970 1557.21,1782.57 1590,1782.57 v1(1590,1775)
  Bottom Layer w10: P10.5@444.29,2120.71 444.29,2050.71 510,1985 570,1985 630,2045 715,2045 805,2135 v1(865,2135) ; v1(1590,1775) 1595.75,1769.25 1820.86,1769.25 U1.36@1841.11,1789.51
SAI2_SD_A: P10.8 U1.80 | length 2160.8
  Top Layer w10: v1(910,2205) 910,2220 895,2235 840,2235 825,2220 825,2125 850,2100 870,2100 1015,1955 1363.57,1955 1540,1778.57 1540,1650 1493,1603 v1(1493,1545)
  Bottom Layer w10: P10.8@585.71,2120.71 621.42,2085 710,2085 800.75,2175.75 895.75,2175.75 910,2190 v1(910,2205) ; U1.80@1152.1,1295.37 1229.73,1373 1321,1373 v1(1493,1545)
SAI2_SD_B: P10.3 U1.34 | length 1810.4
  Top Layer w10: v1@855,2210 v1(855,2205) 855,2200 1070,1985 1376,1985 1559.79,1801.21 v1@1613.79,1801.21
  Bottom Layer w10: P10.3@373.58,2050 373.58,2123.58 420,2170 465,2170 490,2145 540,2145 565,2170 610,2170 665,2115 715,2115 805,2205 v1(855,2205) ; v1(1620,1805) 1620,1795 1630.75,1784.25 1780.18,1784.25 U1.34@1813.27,1817.35
SPI1_MISO: U1.134
SPI1_MOSI: U1.135
SPI1_SCK: U1.133
SPI2_MISO: P7.7 U1.75 | length 1066.6
  Ground w10: v1(1234,1111) 1264,1081 1498.43,1081 1723.43,1306 P7.7@2053,1306
  Bottom Layer w10: U1.75@1221.7,1225.77 1195,1199.07 1195,1165 1234,1126 v1(1234,1111)
SPI2_MOSI: P7.6 U1.76 | length 1464.7
  Ground w10: v1(1195,1112) 1195,1087 1171,1063 1171,1039 1192,1018 1268,1018 1284,1034 1284,1047 1303,1066 1504.64,1066 1729.64,1291 1984,1291 2020,1255 2083,1255 2105,1277 2105,1351 2153,1399 P7.6@2153,1406
  Bottom Layer w10: v1(1195,1112) 1195,1141 1180,1156 1180,1211.91 U1.76@1207.78,1239.69
SPI2_NSS: P7.4 U1.73 | length 1182.1
  Ground w10: v1(1306,1134) 1328,1112 1487,1112 1716,1341 1877,1341 2004,1468 2004,1529 2029,1554 2105,1554 P7.4@2153,1506
  Bottom Layer w10: U1.73@1249.54,1197.93 1249.54,1190.46 v1(1306,1134)
SPI2_SCK: P7.5 U1.74 | length 1051.4
  Ground w10: v1(1274,1110) 1275,1109 1292,1109 1304,1097 1493.21,1097 1717.21,1321 1942,1321 2027,1406 P7.5@2053,1406
  Bottom Layer w10: U1.74@1235.62,1211.85 1210,1186.23 1210,1174 v1(1274,1110)
STATUS_LED: R31.2 U1.123 | length 855.4
  Top Layer w10: R31.2@921.54,2455 921.54,2333.46 955,2300 955,2195 975,2175 1072.91,2175 1172.91,2075 v1(1180,2075)
  Bottom Layer w10: U1.123@957.23,1984.38 981.61,1960 1110,1960 1180,2030 v1(1180,2075)
SWCLK: P9.3 U1.109 | length 110
  Top Layer w10: v1@731,1774 741,1774 745,1770 P9.3@785,1810
  Bottom Layer w10: v1@731,1774 744,1774 759.51,1789.51 U1.109@762.36,1789.51
  other v1: 731,1775
SWDIO: P9.1 U1.105 | length 278.5
  Top Layer w10: v1@869,1757 932,1757 P9.1@985,1810
  Bottom Layer w10: U1.105@804.12,1643.36 869,1708.24 v1@869,1757
  other v1: 869,1756
TIM1_CH4: U1.103
TIM2_CH1: U1.110
TIM4_CH2: U1.137
TIM5_CH2: U1.35
TS_INT: P4.9 U1.2 | length 1839.4
  Top Layer w10: v1(2293,1225) 2294.52,1223.48 P4.9@2294.52,1180
  Power w10: v1(1391,2096) 1391,2003 1344,1956 1344,1804.21 1494.21,1654 1593,1654 1638,1609 1717.21,1609 1736.21,1590 1853,1590 1904,1539 1904,1433 1967,1370 1967,1305 2047,1225 v1@2287,1225
  Bottom Layer w10: U1.2@1367.85,2262.77 1340,2234.92 1340,2147 v1(1391,2096)
TS_RESET: P4.7 U1.7 | length 1747.2
  Top Layer w10: v1(1423,2131) 1423,2132 1465,2174 1494,2174 1821,1847 1821,1806.21 1915,1712.21 1915,1453 1936,1432 1958,1432 1981,1455 v1(2085,1455) ; v1(2189,1456) 2205,1440 2205,1283 2223,1265 2302,1265 2333.89,1233.11 P4.7@2333.89,1180
  Bottom Layer w10: v1(1423,2131) 1405,2149 1405,2160.72 U1.7@1437.45,2193.17 ; v1(2085,1455) 2191,1455 2192,1456 v1@2191,1457
VDD: C7.2 C9.2 C10.2 C12.1 C24.2 C25.2 C26.2 C27.2 C28.2 C30.2 C35.2 C38.2 C39.2 C40.2 C41.2 C42.2 L1.1 L3.1 R12.2 R22.2 R24.1 U1.17 U1.30 U1.39 U1.52 U1.62 U1.72 U1.84 U1.95 U1.108 U1.121 U1.131 U1.144 | length 7027
  Top Layer w10: v1(1102,1541) 1155.46,1541 C12.1@1160,1536.46 ; v1(1235,2460) 1235,2440 1240,2435 R24.1@1266.54,2435 R24.1@1265,2433.46 ; R12.2@1316.34,2270.66 1316.5,2270.83 1333.67,2288 1373,2288 1418,2243 1418,2204 R22.2@1351.66,2137.66 ; C28.2@1741.34,1808.66 C28.2@1746.34,1808.66
  Top Layer w20: v1(1135,1390) v1@1137.89,1392.89
  Top Layer w30: C24.2@933.66,1983.66 1002.33,1915 v1(1005,1915) ; C25.2@1073.66,2128.66 1130,2072.33 v1(1130,2070) ; v1(1135,1390) 1110,1365 1110,1352.67 C40.2@1206.34,1256.34 1292.67,1170 v1(1320,1170) ; C26.2@1263.66,2323.66 1316.5,2270.83 1316.5,2266.5 v1(1290,2240) ; C41.2@1413.66,1343.66 1445,1375 v1(1445,1376) ; v1(1580,1503) 1580,1495.67 C42.2@1626.34,1449.34 ; v1@1627,1036 1627,1138 1686.4,1197.4 C9.2@1715,1197.4 ; C9.2@1710,1207.4 1929.13,1207.4 L1.1@1931.54,1205 ; v1(1710,1840) C28.2@1741.34,1808.66 ; v1(1775,1705) 1755,1685 1755,1650 C27.2@1785,1620
  Power w30: v1(830,1756) 830,1717 843,1704 ; v1(1320,1170) 1443,1170 1445,1172 ; v1(1710,1840) 1775,1775 v1(1775,1705)
  Power w50: 843,1704 897,1704 ; v1(1130,2070) 1075,2125 ; v1(1135,1390) 1100,1390 1065,1425 1065,1504 v1(1102,1541) 1060,1541 897,1704 ; v1(1235,2460) 1235,2358 1290,2303 ; v1(1580,1503) 1560,1483 1560,1404 1532,1376 v1(1445,1376) 1445,1172 1445,1119 1524,1040 v1(1626,1040) ; v1(2143,1725) 2123,1705 v1(1775,1705) 1764,1716 1573,1716 1525,1764 v1(1525,1953) 1550,1978 1550,2109 1417,2242 1292,2242 v1(1290,2240) 1290,2303 ; 897,1704 923,1730 923,1769 1005,1851 v1(1005,1915) 1005,2055 1075,2125 ; 1075,2125 1253,2303 1290,2303
  Bottom Layer w10: C38.2@633.66,1783.66 651.66,1765.66 ; U1.108@762.36,1685.11 830,1752.76 v1(830,1756) ; U1.121@929.39,1956.54 970.93,1915 v1(1005,1915) ; U1.95@943.31,1504.16 984.15,1545 1098,1545 v1(1102,1541) ; U1.131@1068.59,2095.74 1099.32,2065 1125,2065 v1(1130,2070) ; U1.84@1096.42,1351.05 1135,1389.62 v1(1135,1390) ; U1.144@1249.54,2276.69 1286.23,2240 v1(1290,2240) ; v1(1320,1170) 1347.93,1197.93 U1.72@1353.93,1197.93 ; v1(1445,1376) 1454,1376 1493.18,1336.82 U1.62@1493.39,1336.82 ; v1(1525,1953) 1525,2002.33 U1.17@1576.64,2053.98 ; v1(1580,1503) 1605.64,1503 U1.52@1632.32,1476.32 ; v1(1710,1840) 1724.57,1840 U1.30@1757.6,1873.03 ; v1(1775,1705) 1775,1695.55 U1.39@1813.27,1657.27
  Bottom Layer w30: 651.66,1765.66 651.66,1750.34 702,1700 744,1700 753,1691 ; C35.2@2055,1752.6 2118.46,1752.6 C30.2@2125,1759.13 2125,1711.54 L3.1@2141.54,1695
VDDA: C31.2 C32.2 L3.2 R27.1 U1.33 | length 1415.9
  Power w30: v1(1840,1875) 2081,1875 2165,1959 2261,1959 v1(2295,1925)
  Bottom Layer w10: U1.33@1799.36,1831.27 1840,1871.91 v1(1840,1875)
  Bottom Layer w20: R27.1@2276.54,1695 2276.54,1658.46 2285,1650 2375,1650 2385,1660 2385,1700 2400,1715 2455,1715 2475,1735 2475,1780 2460,1795 2440,1795 2430,1805 2430,1870 2305,1870 2295,1880 v1(2295,1925)
  Bottom Layer w30: C32.2@2255,1759.13 C31.2@2190,1759.13 2208.46,1740.67 L3.2@2208.46,1695 R27.1@2276.54,1695
VSS: C1.1 C2.1 C3.1 C4.1 C5.1 C6.1 C7.1 C8.1 C9.1 C10.1 C11.1 C12.2 C13.1 C14.1 C15.1 C16.1 C17.1 C18.1 C19.1 C20.1 C21.1 C22.1 C23.1 C24.1 C25.1 C26.1 C27.1 C28.1 C29.1 C30.1 C31.1 C32.1 C33.1 C34.1 C35.1 C36.1 C37.1 C38.1 C39.1 C40.1 C41.1 C42.1 C43.1 C44.1 C45.1 C46.1 C47.1 C48.1 C49.1 C50.1 C51.1 C52.1 C66.1 C67.1 C68.1 C70.1 C71.1 C72.1 C73.1 C74.1 C75.1 C79.1 C80.2 C81.1 C82.1 C83.2 C84.2 C85.2 C86.2 C87.2 C88.1 C89.1 C90.1 C91.1 C92.1 C93.1 C94.1 D1.2 L7.1 P1.1 P2.2 P3.2 P4.1 P4.10 P7.1 P8.3 P8.5 P8.6 P8.7 P8.13 P8.14 P8.21 P8.22 P8.23 P8.29 P8.35 P8.36 P9.2 P10.1 P11.1 P12.1 P12.8 Q1.2 Q2.2 Q3.2 Q4.2 R1.2 R2.2 R3.2 R4.2 R5.2 R6.2 R7.2 R8.2 R9.2 R10.2 R11.2 R13.2 R14.2 R15.2 R16.2 R17.2 R18.2 R19.2 R20.2 R35.1 R44.1 R58.1 R59.2 U1.16 U1.31 U1.38 U1.51 U1.61 U1.83 U1.94 U1.107 U1.120 U1.130 U2.6 U2.12 U2.32 U2.38 U2.44 U2.46 U2.52 U2.58 U2.72 U2.78 U2.84 U2.86 U3.3 U4.8 U5.3 U8.5 U9.1 U9.2 U9.3 U9.4 U10.4 U11.2 U12.1 | length 12720.8
  Top Layer w10: P8.3@215.37,1600 215.37,1634.37 220,1639 269,1639 274.43,1633.57 P8.6@274.43,1600 ; P8.5@254.74,1600 P8.6@274.43,1600 ; v1(290,1545) 290,1555 274.43,1570.57 P8.6@274.43,1600 ; P8.7@294.11,1600 P8.6@274.43,1600 ; 422.06,1600 422.06,1457.94 v1(450,1430) ; U5.3@509.35,1006.59 531.59,1006.59 540,1015 568.46,1015 C52.1@569,1014.46 ; U3.3@509.35,1147.59 532.59,1147.59 545,1160 569.54,1160 C47.1@570.54,1161 ; P8.21@569.7,1600 P8.22@589.39,1600 ; v1(590,1555) 589.39,1555.61 P8.22@589.39,1600 ; P8.23@609.07,1600 P8.22@589.39,1600 ; v1@687.81,1442.19 v1(683.54,1446.46) 727.18,1490.11 P8.29@727.18,1600 ; 855.13,1600 855.13,1559.87 875,1540 ; v1(1035,175) 1035,144.41 R9.2@1054.41,125 ; v1(2154,1171) 2237,1171 2246,1180 P4.10@2274.84,1180 ; P4.1@2453,1180 2466.46,1193.46 v1(2489.46,1193.46)
  Top Layer w20: U4.8@371.02,510 432,510 v1(433,511) ; C52.1@569,1014.46 R44.1@629,1014.46 ; C47.1@570.54,1161 R35.1@630.54,1161 ; 875,1540 915,1540 945,1510 945,1440 955,1430 1070,1430 v1(1115,1475) ; C23.1@916.54,124 C23.1@918.54,122 ; C16.1@985,933.46 v1(985,970) 985,1001.54 C1.1@988.46,1005 ; D1.2@1085,2514.53 1174.53,2514.53 1185,2525 P1.1@1235,2525 ; v1(1190,2335) 1190,2302.67 C26.1@1216.34,2276.34 ; R10.2@1279,96 R11.2@1279,146 R14.2@1279,196 R15.2@1279,246 1279,269 ; R20.2@1279,448 R18.2@1279,396 R17.2@1279,346 R16.2@1279,296 1279,269 ; v1@1282.33,1275 1292,1265.33 1292,1236 1316,1212 1330,1212 1362,1180 1362,1146.54 C37.1@1404,1104.54 ; v1(1306,271) 1304,269 1279,269 ; R7.2@1330.41,94.41 R19.2@1330.41,446 ; R8.2@1550.59,125 1555,125 1580,150 v1(1580,175) ; U10.4@1815.36,2030.36 1835,2050 1835,2110 1905,2180 1922.33,2180 ; C45.1@1948.66,2153.66 1922.33,2180 ; P3.2@2039.29,2290.71 1928.58,2180 1922.33,2180
  Top Layer w30: C51.1@720,363.07 720,335 735,320 ; C49.1@733.46,280 735,281.54 735,320 ; v1(790,1150) 791.54,1148.46 C44.1@791.54,1105 ; P9.2@885,1810 885,1830 v1(935,1880) 910,1905 910,1912.67 C24.1@886.34,1936.34 ; C23.1@916.54,124 C22.1@916.54,220 916.54,320 ; C17.1@916.54,720 C20.1@916.54,470 C21.1@916.54,345 916.54,320 ; C25.1@1026.34,2081.34 v1@1080,2027.67 ; v1(1090,2240) 1090,2202.67 R13.2@1116.34,2176.34 ; v1(1115,1475) 1116.54,1476.54 C12.2@1160,1476.54 ; C39.1@1208.66,1348.66 1282.33,1275 v1(1295,1275) 1335,1315 1347.67,1315 C41.1@1366.34,1296.34 ; U9.4@1288,1828.43 1433.04,1828.43 C79.1@1507,1754.46 ; v1(1440,2025) 1466.34,2051.34 C80.2@1466.34,2053.66 ; C29.1@1553.46,2530 1559.46,2524 1584,2524 1634,2474 1713.33,2474 C43.1@1743.66,2443.66 1774.66,2412.66 C50.1@1774.66,2369.66 1810.67,2333.66 C48.1@1810.67,2292.36 ; v1(1620,1540) 1630.33,1540 C42.1@1673.66,1496.66 ; v1(1634,982) 1683.46,932.54 C15.1@1683.46,897.43 1683.46,886.54 1708.46,861.54 C14.1@1708.46,825 ; C5.1@1673.46,430 1673.46,384.54 1683.46,374.54 C4.1@1683.46,337.86 C3.1@1683.46,216.43 C2.1@1683.46,115 ; C6.1@1693.46,592 1710,608.54 C14.1@1710,830 ; C9.1@1710,1132.6 C10.1@1821,1132.6 ; C28.1@1793.66,1761.34 1850,1705 1850,1685 C27.1@1832.33,1667.33 1855,1644.65 v1(1855,1620) ; P12.8@1820,1020 1820,1131.6 C10.1@1821,1132.6 ; C8.1@1931.54,1135 1929.13,1132.6 C10.1@1821,1132.6 ; C45.1@1948.66,2153.66 1949.36,2153.66 C46.1@2001.58,2101.44 ; 1949,944 1949,978 1970,999 v1(1992,999) ; C72.1@2008.46,560 2047,560 ; v1(2046,529) 2046,559 2047,560 ; v1@2083.46,741 2083.46,633.94 C70.1@2087.4,630 ; R59.2@2085.54,561 2084.54,560 2047,560 ; C74.1@2096.34,1706 C75.1@2096.34,1845.43 2109.77,1832 2156,1832 2180,1856 2361.94,1856 C84.2@2365,1859.06 ; C86.2@2258,1463.06 2271.06,1450 U11.2@2370,1450 2480,1450 ; C66.1@2260,902.83 2271.81,914.65 2334.49,914.65 2398.19,914.65 C68.1@2410,902.83 2450.83,902.83 v1(2453,905) ; C89.1@2480,1403.46 C89.1@2480,1410.46 2480,1450 ; C88.1@2480,1496.54 2480,1450 ; 735,320 739,316 P11.1@817,316 912.54,316 916.54,320
  Bottom Layer w10: v1(290,1545) 290,1594.98 R58.1@300.02,1605 ; 641,1654 641,1668.6 642.2,1669.8 715.2,1669.8 735,1650 755.08,1650 U1.107@776.28,1671.19 ; U1.120@915.47,1942.62 945,1913.09 945,1890 v1(935,1880) ; U1.94@957.23,1490.24 986.99,1520 1070,1520 v1(1115,1475) ; v1(985,970) 985,912 1002.98,894.02 U2.84@1088.46,894.02 ; v1(1030,775) 1030.91,775.91 U2.78@1088.46,775.91 ; v1(1032,264) 1032.09,264.09 U2.52@1088.46,264.09 ; v1(1032,381) 1033.2,382.2 U2.58@1088.46,382.2 ; v1(1032,658) 1032.2,657.8 U2.72@1088.46,657.8 ; v1(1035,175) 1035,140 ; U1.130@1054.67,2081.82 1085,2051.48 1085,2030 v1(1080,2025) ; v1(1075,1300) 1075,1301.78 U1.83@1110.34,1337.13 ; v1(1087,971) 1089.46,968.54 U2.86@1089.46,933.39 ; U2.44@1088.46,106.61 1043.39,106.61 1035,115 1035,140 ; U2.46@1088.46,145.98 1040.98,145.98 1035,140 ; v1@1438.05,1420.05 U1.61@1507.05,1351.05 ; v1(1440,2025) 1519.83,2025 U1.16@1562.73,2067.9 ; U2.38@1521.54,205.04 U2.38@1522.54,205.04 1580,205.04 ; U2.32@1521.54,323.15 1638.31,323.15 v1(1684.46,277) ; U2.12@1521.54,716.85 v1(1586.85,716.85) ; U2.6@1521.54,834.96 1569.96,834.96 v1(1585,850) ; v1(1580,175) 1580,205.04 ; v1(1620,1540) 1620,1516.48 U1.51@1646.24,1490.24 ; v1@1680,1810 1693.8,1810 1695,1808.8 1721.2,1808.8 U1.31@1771.52,1859.11 ; v1(1684,164) 1679.46,164 1638.43,205.04 1580,205.04 ; U1.38@1827.19,1671.19 1860,1638.39 1860,1620 v1(1855,1620)
  Bottom Layer w20: v1(490,720) 526.54,756.54 L7.1@570,756.54 ; C18.1@2173.66,1998.66 2205,2030 2241.42,2030 P2.2@2270.71,2059.29 ; Q3.2@2192.68,490 Q2.2@2030,490 2030,506.19 1986,550.19 1986,611 2007.6,632.6 Q1.2@2031.34,632.6 Q4.2@2192.68,632.6 ; C93.1@2470,1067.4 2470,1174 v1(2489.46,1193.46) C92.1@2540,1193.46
  Bottom Layer w30: C38.1@586.34,1736.34 640.6,1682.08 C81.1@640.6,1554 ; v1(590,1555) 639.6,1555 C81.1@640.6,1554 ; v1(683.54,1446.46) 658.54,1471.46 658.54,1483 640.6,1500.94 C81.1@640.6,1554 ; C11.1@1743.66,2443.66 1743.66,2442.34 v1(1771,2415) ; P12.8@1820,1020 1923,1020 1949.6,993.4 1949.6,977 C94.1@1950,977.4 1971.65,999.06 C87.2@2060,999.06 ; C90.1@2043,1171.4 2185.92,1171.4 U12.1@2196.45,1160.87 ; 2046,506 v1(2046,529) ; C35.1@2055,1827.4 2388.66,1827.4 C33.1@2390,1826.06 ; U11.2@2370,1450 2489.06,1450 C85.2@2500,1439.06
  other v1: 1304,123 915,175 915,400 1305,423 915,530 915,660 2082,741 598,1014 598,1161 1439,1421 1471,1790 1685,1810 2157,1827.4
pads on no net: P4.4 P4.6 P4.8 P8.37 P8.38 P8.39 P8.40 U2.14 U2.30 U2.57 U2.69 U2.70 U2.73 U3.1 U4.9 U5.1 U6.5

## Polygon pours and split planes (outlines as drawn)
VSS on Ground "Bottom Layer-No Net" (solid, remove dead copper, pour order 0): 1278.34,2616.41 1534.2,2595.48 1858.51,2495.06 1986.77,2429.49 2216.73,2262.85 2445.27,1949.01 2585.43,1570.88 2610.69,1331.25 2585.43,1052.6 2527.62,851.25 2445.27,675.6 2374.62,555.54 2265.98,421.27 2048.89,240.34 1900.63,153.13 1637.17,50.28 1359.03,4.95 1154.13,19.9 914.88,67.67 702.48,161.4 519.08,278.59 403.3,381.43 283.37,507.37 145.62,731.25 97.62,829.25 34.42,1039.09 8.1,1268.54 20.84,1510.63 84.99,1749.44 170.78,1929.96 269.85,2091.56 459.85,2290.48 573.7,2381.35 707.02,2461.66 823.62,2516.47 1011.99,2585.05
+3V3 on Power "Bottom Layer-No Net" (solid, remove dead copper, pour order 2): 1356.6,2618.8 1587.37,2586.5 1758.7,2533.45 1860.59,2490.26 1988.84,2424.69 2209.56,2248.79 2455.98,1931.05 2569.6,1631.56 2609.77,1299.8 2594.52,1048.37 2529.7,846.45 2452.86,669.12 2376.7,550.74 2268.06,416.47 2081.27,251.54 1867.7,136.45 1702.78,67.14 1371.29,4.13 1115.19,22.41 825.7,108.45 692.19,167.37 538.7,265.45 474.09,322.84 254.27,542.66 147.7,726.45 99.7,824.45 36.49,1034.29 12.93,1239.77 26.52,1497.99 99.7,1770.45 166.77,1907.45 271.7,2095.45 461.93,2285.68 570.53,2385.68 707.7,2463.45 825.7,2511.67 948.7,2556.45 1067.63,2584.78

## Keep-outs
Keep-Out Layer:
  circle w10: c1310,1310 r1299.21

## Other copper
Top Layer:
  rectangle net VSS: 1279,94.41 1330.41,448
  rectangle net NetC53_2: 260,1001 381,1076
  rectangle net NetC53_2: 260,882 381,1012
  rectangle net NetC53_2: 260,882 382,920
Bottom Layer:
  rectangle net +3V3: 2135,816 2423,1049
  rectangle net +3V3: 2172,1031 2423,1106

## Text inside footprints (layer, text, board x,y; h text height)
P7: Bottom Overlay "8" at 2233,1270 h15 r90; Bottom Overlay "7" at 1989,1263 h15 r90; Bottom Overlay "1" at 1985,1644 h15 r90; Bottom Overlay "2" at 2237,1645 h15 r90
P10: Bottom Overlay "10" at 756.13,2218.71 h15 r45; Bottom Overlay "9" at 618,2339 h15 r45; Bottom Overlay "1" at 238,1951 h15 r45; Bottom Overlay "2" at 357,1837 h15 r45